# Altium PCB ММС схема D650 T9M.pcbdoc (part 1 of 2)
Units mm, origin at the board's own origin, x right, y up, seen from the top; angles counter-clockwise.
Board outline 130 x 14 mm, 2 copper layers (Top Layer, Bottom Layer), stack 1.57 mm thick; 158 components, 79 nets, 412 pads, 74 vias.
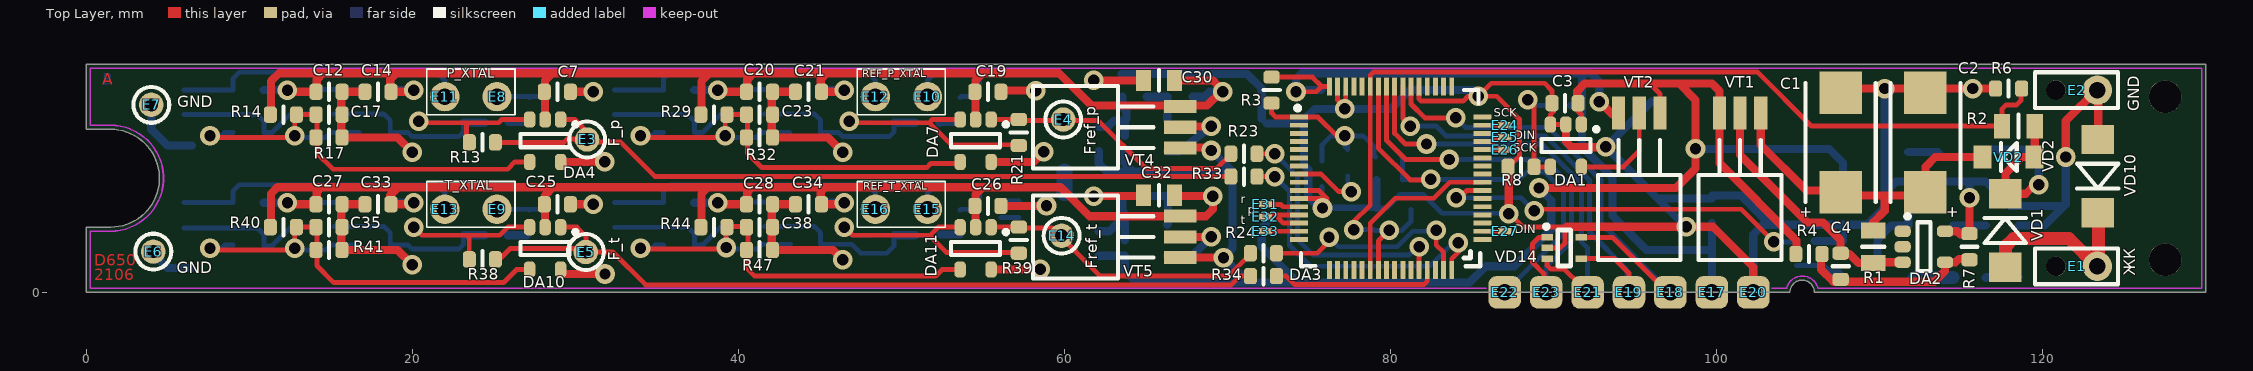
[diagram p0: Top Layer view]
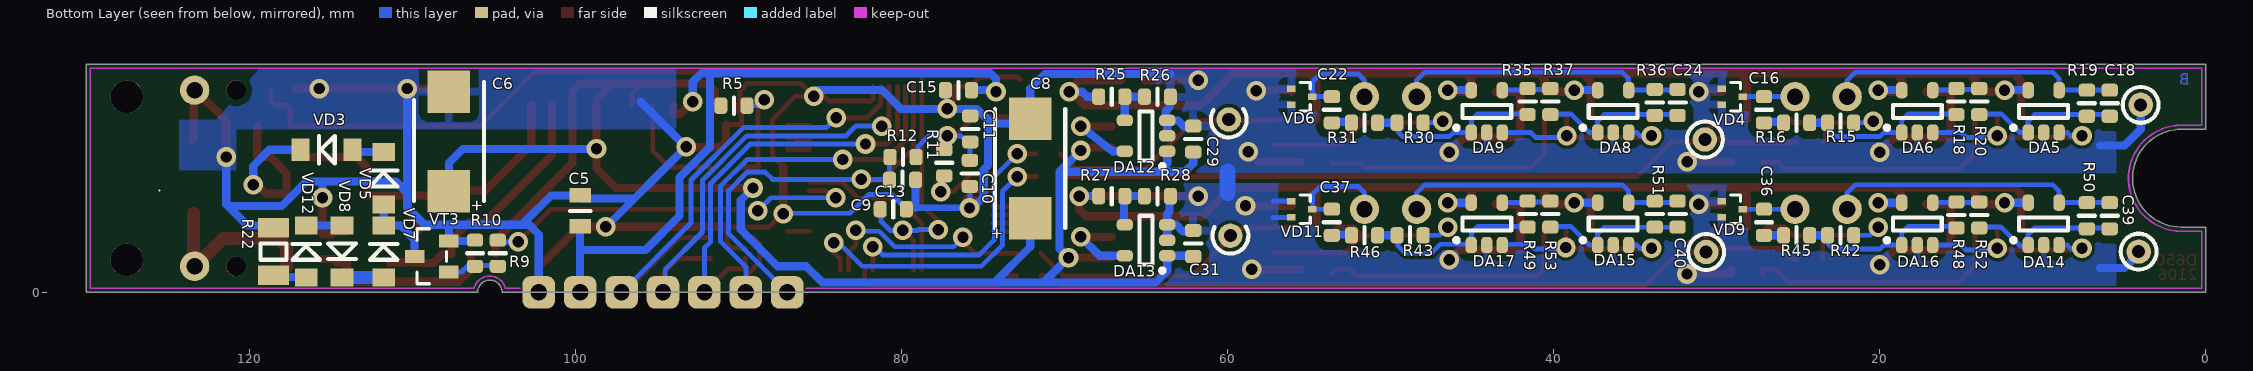
[diagram p1: Bottom Layer view, seen from below]
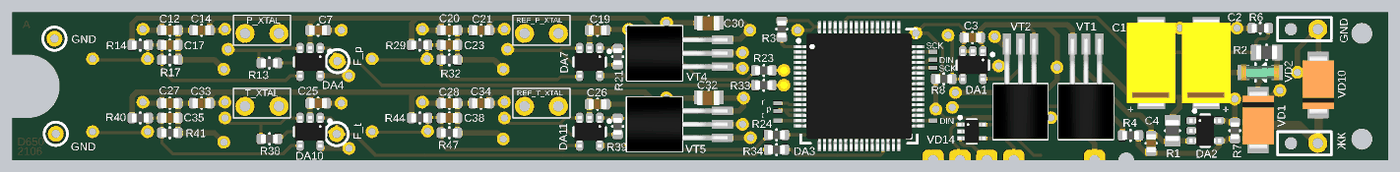
[diagram p2: 3D render of the assembled board from above, using the file's embedded part models]
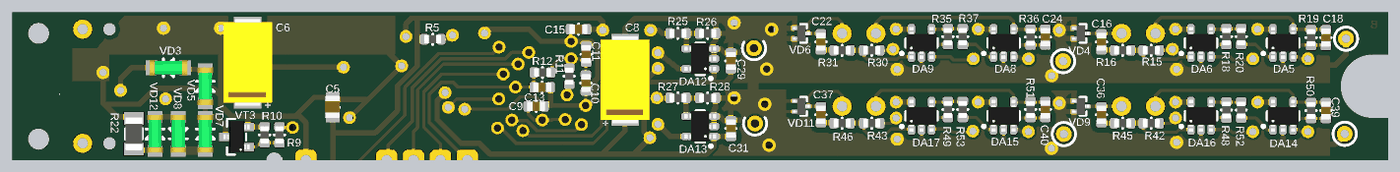
[diagram p3: 3D render of the assembled board from below, using the file's embedded part models]

## Layer stack, top to bottom
Top Solder: solder mask 0.0102, Solder Resist, Dk 3.5
Top Layer: signal copper 0.035
Dielectric1: core 1.5, FR-4, Dk 4.2
Bottom Layer: signal copper 0.035
Bottom Solder: solder mask 0.0102, Solder Resist, Dk 3.5

## Board outline
0,0 0,4 1.5,4 ccw(c1.5,7) 1.5,10 0,10 0,14 130,14 130,0 105.99,0 ccw(c105.24,0) 104.49,0

## Design rules (kind name [scope] priority, off if disabled: settings)
Clearance Clearance_Keepout [OnLayer('Keep-Out Layer')] p1: gap=0.01 ignorepadtopadclearanceinfootprint=FALSE
Clearance Clearance_poly [InNamedPolygon('BOTTOM_GND')] p2: gap=0.35 ignorepadtopadclearanceinfootprint=FALSE except(0.5: SMDPad-Fill SMDPad-Poly SMDPad-Region)
Clearance Clearance_Top_Bot [(OnLayer('Top Layer') OR OnLayer('Bottom Layer'))] p3: gap=0.2 ignorepadtopadclearanceinfootprint=FALSE except(0: Arc-Hole Track-Hole SMDPad-Hole THPad-Hole Via-Hole Fill-Hole Poly-Hole Region-Hole Text-Hole; 0.5: SMDPad-Fill SMDPad-Poly SMDPad-Region)
Clearance Clearance_INTERNAL [(OnLayer('Signal Layer 1') OR OnLayer('Signal Layer 2'))] p4: gap=0.25 ignorepadtopadclearanceinfootprint=FALSE except(0: Arc-Hole Track-Hole SMDPad-Hole THPad-Hole Via-Hole Fill-Hole Poly-Hole Region-Hole Text-Hole)
Clearance "Clearance_Different nets" [All] p5: gap=0.2 ignorepadtopadclearanceinfootprint=FALSE
Clearance "Clearance_Same net" [IsVia vs IsVia] p6: gap=0.3 ignorepadtopadclearanceinfootprint=FALSE except(0: Arc-Hole Track-Hole SMDPad-Hole THPad-Hole Via-Hole Fill-Hole Poly-Hole Region-Hole Text-Hole; 0.5: SMDPad-Fill SMDPad-Poly SMDPad-Region)
Clearance Clearance_PadtoPad [IsPAD vs IsPad] p7: gap=0.2 ignorepadtopadclearanceinfootprint=FALSE except(0: Arc-Hole Track-Hole SMDPad-Hole THPad-Hole Via-Hole Fill-Hole Poly-Hole Region-Hole Text-Hole; 0.5: SMDPad-Fill SMDPad-Poly SMDPad-Region)
ComponentClearance [All] p1: gap=0.2 collisioncheckmode=3 verticalgap=0.2 showdistances=FALSE
DiffPairsRouting DiffPairs_100Ohm [InDifferentialPairClass('All Differential Pairs')] p1: maxlimit=0.3 minlimit=0.3 mostfreqgap=0.3 toplayer_minwidth=0.381 toplayer_maxwidth=0.381 toplayer_prefwidth=0.381 bottomlayer_minwidth=0.381 bottomlayer_maxwidth=0.381 bottomlayer_prefwidth=0.381 maxuncoupledlength=12.7 // 100 Ohm differential traces
HoleSize [All] p1: absolutevalues=TRUE maxlimit=3.5 minlimit=0.025 maxpercent=80.000 minpercent=20.000
MinimumAnnularRing [All] p1: minimumring=0.1
MinimumSolderMaskSliver [All] p1 off: minsoldermaskwidth=0.1
PlaneClearance [All] p1: clearance=0.25
PlaneConnect [All] p1: planeconnectstyle=Direct reliefexpansion=0.508 reliefentries=4 reliefconductorwidth=0.254 reliefairgap=0.254
PolygonConnect [All] p1: thpad.connectstyle=Relief thpad.reliefconductorwidth=0.5 thpad.reliefentries=4 thpad.polygonreliefangle="90 Angle" thpad.airgapwidth=0.5 smdpad.connectstyle=Relief smdpad.reliefconductorwidth=0.5 smdpad.reliefentries=4 smdpad.polygonreliefangle="90 Angle" smdpad.airgapwidth=0.5 via.connectstyle=Direct via.reliefconductorwidth=0.254 via.reliefentries=4 via.polygonreliefangle="90 Angle" via.airgapwidth=0.254
RoutingVias [All] p1: holewidth=0.7 width=1.2 viastyle="Through Hole" minholewidth=0.4 minwidth=0.4 maxholewidth=0.8 maxwidth=1.2
SilkToSilkClearance [All] p1 off: silktosilkclearance=0.1
SilkToSolderMaskClearance [IsPad] p1 off: minsilkscreentomaskgap=0.1 clearancetoexposedcopper=TRUE
SolderMaskExpansion [All] p1: expansion=0.025
Width Width_all [All] p1: maxlimit=1 minlimit=0.3 preferedwidth=0.3 minimp=50.000000 maximp=50.000000 favimp=50.000000 // All other trace width
22 further rules are at their usual default settings.

## Components (designator, comment, footprint, x,y, rotation, side; value= is the part's Value field where it differs from the comment)
C1 "10 мкФ" CP7343-31 107.6,9.2 r90 top
C2 "10 мкФ" CP7343-31 112.8,9.2 r90 top
C3 "1 мкФ" CC0603 90.7,11.6 r180 top
C4 "220 пФ" CC0603 107.6,1.6 r270 top
C5 "4,7 мкФ" CC0805 99.7,5 r90 bottom
C6 "100 мкФ" CP7343-31 107.75,9.25 r90 bottom
C7 "0,1 мкФ" CC0603 28.9,12.3 r0 top
C8 "100 мкФ" CP7343-31 72.1,7.6 r90 bottom
C9 "220 пФ" CC0603 80.5,5.1 r180 bottom
C10 "0,1 мкФ" CC0603 75.8,7.3 r270 bottom
C11 "1 мкФ" CC0603 75.775,10.025 r90 bottom
C12 "0,1 мкФ" CC0603 14.9,12.3 r0 top
C13 "0,1 мкФ" CC0603 79.925,6.9 r180 bottom
C14 "0,1 мкФ" CC0603 17.9,12.3 r180 top
C15 "0,1 мкФ" CC0603 76.5,12.4 r0 bottom
C16 "0,1 мкФ" CC0603 27.1,11.2 r90 bottom
C17 "0,1 мкФ" CC0603 14.9,10.9 r0 top
C18 "22 пФ" CC0603 5.9,11.6 r270 bottom
C19 "0,1 мкФ" CC0603 55.3,12.3 r0 top
C20 "0,1 мкФ" CC0603 41.3,12.3 r0 top
C21 "0,1 мкФ" CC0603 44.3,12.3 r180 top
C22 "0,1 мкФ" CC0603 53.6,11.2 r90 bottom
C23 "0,1 мкФ" CC0603 41.3,10.9 r0 top
C24 "22 пФ" CC0603 32.4,11.646 r270 bottom
C25 "0,1 мкФ" CC0603 28.9,5.4 r0 top
C26 "0,1 мкФ" CC0603 55.3,5.3 r0 top
C27 "0,1 мкФ" CC0603 14.9,5.4 r0 top
C28 "0,1 мкФ" CC0603 41.3,5.4 r0 top
C29 "1 мкФ" CC0603 62.1,9.4 r90 bottom
C30 "4,7 мкФ" CC0805 65.8,13 r180 top
C31 "1 мкФ" CC0603 62.1,3 r90 bottom
C32 "4,7 мкФ" CC0805 65.8,5.95 r180 top
C33 "0,1 мкФ" CC0603 17.9,5.4 r180 top
C34 "0,1 мкФ" CC0603 44.3,5.4 r180 top
C35 "0,1 мкФ" CC0603 14.9,4 r0 top
C36 "0,1 мкФ" CC0603 27.1,4.3 r90 bottom
C37 "0,1 мкФ" CC0603 53.6,4.3 r90 bottom
C38 "0,1 мкФ" CC0603 41.3,4 r0 top
C39 "22 пФ" CC0603 5.9,4.7 r270 bottom
C40 "22 пФ" CC0603 32.4,4.8 r270 bottom
DA1 "TPS76901SDBVTEP" SOT23-5 91.7,10.3 r180 top
DA2 "TLVH431BQDBVRQ1" SOT23-5 111.4,3.75 r270 top
DA3 "MSP430F2619SPM" "LQFP64_SMALL PADS" 80,7 r0 top
DA4 "LMC7211AIM5" SOT23-5 29.1,10.6 r180 top
DA5 "OPA340NA" SOT23-5 10.9,9.8 r180 bottom
DA6 "OPA340NA" SOT23-5 18.65,9.8 r180 bottom
DA7 "LMC7211AIM5" SOT23-5 55.5,10.6 r180 top
DA8 "OPA340NA" SOT23-5 37.3,9.8 r180 bottom
DA9 "OPA340NA" SOT23-5 45.05,9.8 r180 bottom
DA10 "LMC7211AIM5" SOT23-5 29.1,4 r180 top
DA11 "LMC7211AIM5" SOT23-5 55.5,4 r180 top
DA12 "TPS76901SDBVTEP" SOT23-5 63.7,8.65 r90 bottom
DA13 "TPS76901SDBVTEP" SOT23-5 63.7,2.25 r90 bottom
DA14 "OPA340NA" SOT23-5 10.9,2.9 r180 bottom
DA15 "OPA340NA" SOT23-5 37.3,2.9 r180 bottom
DA16 "OPA340NA" SOT23-5 18.65,2.9 r180 bottom
DA17 "OPA340NA" SOT23-5 45.05,2.9 r180 bottom
E1 "ЖК" Holes_x2 123.34,1.6 r90 top
E2 "GND" Holes_x2 123.34,12.4 r90 top
E3 "F_p" KT08X15 30.725,9.375 r0 top
E4 "Fref_p" KT08X15 59.925,10.6 r0 top
E5 "F_t" KT08X15 30.65,2.475 r0 top
E6 "GND" KT08X15 4.125,2.5 r0 top
E7 "GND" KT08X15 4,11.5 r0 top
E8 "P_XTAL1" "HOLES_1 mm"#1 25.2,12 r180 top
E9 "T_XTAL1" "HOLES_1 mm"#1 25.2,5.1 r90 top
E10 "REF_P_XTAL1" "HOLES_1 mm"#1 51.6,12 r90 top
E11 "P_XTAL" "HOLES_1 mm"#2 -1.5,6.2 r90 top
E12 "REF_P_XTAL" "HOLES_1 mm"#1 48.4,12 r90 top
E13 "T_XTAL" "HOLES_1 mm"#1 22,5.1 r90 top
E14 "Fref_t" KT08X15 59.825,3.475 r0 top
E15 "REF_T_XTAL1" "HOLES_1 mm"#1 51.6,5.1 r90 top
E16 "REF_T_XTAL" "HOLES_1 mm"#1 48.4,5.1 r90 top
E17 "KP" "EDGE HOLE"#1 89.799,-5.5 r0 top
E18 "KP" "EDGE HOLE"#2 85.499,-5.5 r0 top
E19 "KP" "EDGE HOLE"#3 114.3,-3.8 r0 top
E20 "KP" "EDGE HOLE"#4 110,-3.8 r0 top
E21 "KP" "EDGE HOLE"#5 105.6,-3.8 r0 top
E22 "KP" "EDGE HOLE"#6 91.56,-4 r0 top
E23 "KP" "EDGE HOLE"#7 97,-3.8 r0 top
E24 "SCK" 0.4x0.8mm#1 87.05,10.25 r180 top
E25 "DIN" 0.4x0.8mm#2 87.15,9.5 r180 top
E26 "SCK" 0.4x0.8mm#1 87.05,8.75 r180 top
E27 "DIN" 0.4x0.8mm#1 87.05,3.75 r180 top
E31 "r" 0.4x0.8mm#1 72.375,5.4 r180 top
E32 "p" 0.4x0.8mm#1 72.375,4.65 r180 top
E33 "t" 0.4x0.8mm#1 72.375,3.75 r180 top
R1 "47 к" RC0805 109.6,2.8 r90 top
R2 "130 к" RC0805 118.5,10.2 r0 top
R3 "12" RC0603 72.7,12.4 r270 top
R4 "301 к" RC0603 105.65,2.35 r180 top
R5 "330 к" RC0603 90.275,11.45 r0 bottom
R6 "10 к" RC0603 117.9,12.5 r0 top
R7 "100 к" RC0603 115.5,2.8 r270 top
R8 "180 к" RC0603 88,7.7 r0 top
R9 "100" RC0603 104.75,2.4 r270 bottom
R10 "47 к" RC0603 106.15,2.4 r270 bottom
R11 "100 к" RC0603 77.375,7.95 r270 bottom
R12 "100 к" RC0603 79.9,8.3 r180 bottom
R13 "10 М" RC0603 24.3,9.2 r0 top
R14 "100 к" RC0603 12.1,10.9 r180 top
R15 "100 к" RC0603 22.4,10.4 r180 bottom
R16 "9,1 к" RC0603 25.1,10.4 r0 bottom
R17 "100 к" RC0603 14.9,9.5 r180 top
R18 "100 к" RC0603 15.3,11.7 r90 bottom
R19 "100 к" RC0603 7.3,11.6 r90 bottom
R20 "3,6 к" RC0603 13.9,11.7 r270 bottom
R21 "10 М" RC0603 57.2,9.8 r90 top
R22 "3,3 к" RES_1206 118.5,2.5 r270 bottom
R23 "4,7 к" RC0603 71,8.5 r0 top
R24 "4,7 к" RC0603 72.2,2.4 r0 top
R25 "330 к" RC0603 67.1,12 r0 bottom
R26 "180 к" RC0603 64.3,12 r0 bottom
R27 "330 к" RC0603 67.1,5.9 r0 bottom
R28 "180 к" RC0603 64.3,5.9 r0 bottom
R29 "100 к" RC0603 38.5,10.9 r180 top
R30 "100 к" RC0603 48.8,10.4 r180 bottom
R31 "9,1 к" RC0603 51.6,10.4 r0 bottom
R32 "100 к" RC0603 41.3,9.5 r180 top
R33 "4,7 к" RC0603 71,7.1 r0 top
R34 "4,7 к" RC0603 72.2,1 r0 top
R35 "100 к" RC0603 41.6,11.7 r90 bottom
R36 "100 к" RC0603 33.8,11.646 r90 bottom
R37 "3,6 к" RC0603 40.2,11.7 r270 bottom
R38 "10 М" RC0603 24.3,2.025 r0 top
R39 "10 М" RC0603 57.2,3.2 r90 top
R40 "100 к" RC0603 12.1,4 r180 top
R41 "100 к" RC0603 14.9,2.6 r180 top
R42 "100 к" RC0603 22.4,3.5 r180 bottom
R43 "100 к" RC0603 48.8,3.5 r180 bottom
R44 "100 к" RC0603 38.5,4 r180 top
R45 "9,1 к" RC0603 25.1,3.5 r0 bottom
R46 "9,1 к" RC0603 51.6,3.5 r0 bottom
R47 "100 к" RC0603 41.3,2.6 r180 top
R48 "100 к" RC0603 15.3,4.75 r90 bottom
R49 "100 к" RC0603 41.6,4.8 r90 bottom
R50 "100 к" RC0603 7.3,4.7 r90 bottom
R51 "100 к" RC0603 33.8,4.8 r90 bottom
R52 "3,6 к" RC0603 13.9,4.75 r270 bottom
R53 "3,6 к" RC0603 40.2,4.8 r270 bottom
VD1 "#NAME?" SMA(DO-214AC) 117.7,3.8 r90 top
VD2 "#NAME?" MiniMELF(SOD-80) 117.9,8.3 r180 top
VD3 "TZMC6V8" MiniMelf(SOD-80) 115.25,8.75 r0 bottom
VD4 "BAV99T" SOT523 28.41,12 r90 bottom
VD5 "TZMC6V8" MiniMelf(SOD-80) 111.75,7 r90 bottom
VD6 "BAV99T" SOT523 54.8,12 r90 bottom
VD7 "TZMC3V3" MiniMelf(SOD-80) 111.75,2.5 r90 bottom
VD8 "TZMC3V3" MiniMelf(SOD-80) 114.3,2.5 r270 bottom
VD9 "BAV99T" SOT523 28.41,5.1 r90 bottom
VD10 "SMAJ33A-TR" SMA(DO-214AC) 123.375,7.125 r270 top
VD11 "BAV99T" SOT523 54.8,5.1 r90 bottom
VD12 "TZMC3V3" MiniMelf(SOD-80) 116.5,2.5 r90 bottom
VD14 "PESD3V3L4UG,115" SC70-5 89.6,3.375 r270 top
VT1 "#NAME?" TO92GOR 101.43,11 r0 top
VT2 "#NAME?" TO92GOR 95.25,11 r0 top
VT3 "ValueSch" SOT23-3 108.8,2.2 r90 bottom
VT4 "#NAME?" TO92GOR 67.1,10.125 r270 top
VT5 "#NAME?" TO92GOR 67.1,3.4 r270 top

## Footprints (in the part's own frame and the unit in brackets; to place one, negate y for a bottom-side part, rotate by r counter-clockwise, add the part's x,y. Pads: shape width x height; smd on the part's side, far side on the other; paste and mask are expansions set on the pad)
0.4x0.8mm#1 [mm]
  rect 0.8x0.4 smd mask+0.07: 1(0.05,0)
0.4x0.8mm#2 [mm]
  rect 0.8x0.4 smd mask+0.07: 1(0.15,0)
CC0603 [mm]
  rrect50% 0.8x1 smd mask+0.07: 1(-0.8,0) 2(0.8,0)
  silkscreen extent 0,-0.5 0,0.5, body extent -0.85,-0.45 0.85,0.45, height 0.5
CC0805 [mm]
  rect 0.9x1.3 smd: 1(-0.95,0) 2(0.95,0)
  Top Layer pour cut-out: -0.5,0.95 0.5,0.95 0.5,-0.95 -0.5,-0.95
  silkscreen extent 0,-0.64 0,0.62, body extent -1,-0.63 1.1,0.72, height 0.7
CP7343-31 [mm]
  rect 2.6x2.6 smd: 1(-3.05,0) 2(3.05,0)
  silkscreen extent -3.65,-2.15 3.65,2.15, body extent -4.1,-2.3 4.1,2.3, height 3.2
"EDGE HOLE"#1 [mm]
  rrect50% 2x2 hole 1 mask+0.07: 1(9.901,5.5)
"EDGE HOLE"#2 [mm]
  rrect50% 2x2 hole 1 mask+0.07: 1(11.661,5.5)
"EDGE HOLE"#3 [mm]
  rrect50% 2x2 hole 1 mask+0.07: 1(-19.68,3.8)
"EDGE HOLE"#4 [mm]
  rrect50% 2x2 hole 1 mask+0.07: 1(-7.76,3.8)
"EDGE HOLE"#5 [mm]
  rrect50% 2x2 hole 1 mask+0.07: 1(-13.52,3.8)
"EDGE HOLE"#6 [mm]
  rrect50% 2x2 hole 1 mask+0.07: 1(-4.56,4)
"EDGE HOLE"#7 [mm]
  rrect50% 2x2 hole 1 mask+0.07: 1(-7.46,3.8)
"HOLES_1 mm"#1 [mm]
  round 1.8 hole 1 mask+0.07: 1(0,0)
"HOLES_1 mm"#2 [mm]
  round 1.8 hole 1 mask+0.07: 1(5.8,-23.5)
Holes_x2 [mm]
  round 1.8 hole 1 mask+0.07: 1(0,0)
  round 1.2 hole 1.2 unplated: 2(0,2.54)
  silkscreen extent -1.1,-1.27 1.1,3.81
KT08X15 [mm]
  round 1.5 hole 0.8 mask+0.07: 1(0,0)
  silkscreen extent -1.1,-1.1 1.1,1.1
"LQFP64_SMALL PADS" [mm]
  rect 1.1x0.3 smd: 1(-5.625,3.75) 2(-5.625,3.25) 3(-5.625,2.75) 4(-5.625,2.25) 5(-5.625,1.75) 6(-5.625,1.25) 7(-5.625,0.75) 8(-5.625,0.25) 9(-5.625,-0.25) 10(-5.625,-0.75) 11(-5.625,-1.25) 12(-5.625,-1.75) 13(-5.625,-2.25) 14(-5.625,-2.75) 15(-5.625,-3.25) 16(-5.625,-3.75) 33(5.625,-3.75) 34(5.625,-3.25) 35(5.625,-2.75) 36(5.625,-2.25) 37(5.625,-1.75) 38(5.625,-1.25) 39(5.625,-0.75) 40(5.625,-0.25) 41(5.625,0.25) 42(5.625,0.75) 43(5.625,1.25) 44(5.625,1.75) 45(5.625,2.25) 46(5.625,2.75) 47(5.625,3.25) 48(5.625,3.75)
  rect 0.3x1.1 smd: 17(-3.75,-5.625) 18(-3.25,-5.625) 19(-2.75,-5.625) 20(-2.25,-5.625) 21(-1.75,-5.625) 22(-1.25,-5.625) 23(-0.75,-5.625) 24(-0.25,-5.625) 25(0.25,-5.625) 26(0.75,-5.625) 27(1.25,-5.625) 28(1.75,-5.625) 29(2.25,-5.625) 30(2.75,-5.625) 31(3.25,-5.625) 32(3.75,-5.625) 49(3.75,5.625) 50(3.25,5.625) 51(2.75,5.625) 52(2.25,5.625) 53(1.75,5.625) 54(1.25,5.625) 55(0.75,5.625) 56(0.25,5.625) 57(-0.25,5.625) 58(-0.75,5.625) 59(-1.25,5.625) 60(-1.75,5.625) 61(-2.25,5.625) 62(-2.75,5.625) 63(-3.25,5.625) 64(-3.75,5.625)
  silkscreen extent -5.82,-4.9 4.9,4.42, body extent -6,-6 6,6, height 1.47
MiniMELF(SOD-80) [mm]
  rect 1.1x1.4 smd: 1(-1.6,0) 2(1.6,0)
  silkscreen extent -0.5,-0.85 0.46,0.85, body extent -1.8,-0.75 1.8,0.75, height 1.5
MiniMelf(SOD-80) [mm]
  rect 1.1x1.4 smd: 1(-1.6,0) 2(1.6,0)
  silkscreen extent -0.5,-0.85 0.46,0.85, body extent -1.8,-0.75 1.8,0.75, height 1.5
RC0603 [mm]
  rrect50% 0.8x1 smd mask+0.07: 1(-0.8,0) 2(0.8,0)
  silkscreen extent 0,-0.5 0,0.5, body extent -0.8,-0.4 0.8,0.4, height 0.45
RC0805 [mm]
  rect 1x1.5 smd: 1(-1,0) 2(1,0)
  Top Layer pour cut-out: -0.5,1.05 0.5,1.05 0.5,-1.05 -0.5,-1.05
  silkscreen extent 0,-0.7 0,0.7, body extent -1,-0.62 1,0.63, height 0.5
RES_1206 [mm]
  rect 1.2x1.9 smd mask+0.07: 1(-1.45,0) 2(1.45,0)
  silkscreen extent -0.5,-0.8 0.5,0.8, body extent -1.55,-0.8 1.55,0.8, height 0.6
SC70-5 [mm]
  rect 0.4x0.7 smd mask+0.07: 1(0,0) 2(0.65,0) 3(1.3,0) 4(1.3,2.1) 5(0,2.1)
  silkscreen extent -0.77,-0.16 1.75,1.45, body extent -0.45,-0.25 1.75,2.35, height 1.11
SMA(DO-214AC) [mm]
  rect 1.8x2 smd: 1(-2.25,0) 2(2.25,0)
  silkscreen extent -0.76,-1.27 0.76,1.27, body extent -2.8,-1.5 2.8,1.5, height 2.2
SOT23-3 [mm]
  rect 0.8x1.2 smd mask+0.07: 1(-0.95,-1.05) 2(0.95,-1.05) 3(0,1.05)
  Top Layer pour cut-out: -1.35,-1.65 -1.35,1.65 1.35,1.65 1.35,-1.65
  silkscreen extent -1.67,-0.9 1.7,0.9, body extent -1.5,-1.25 1.5,1.25, height 1.1
SOT23-5 [mm]
  rrect70% 0.7x1 smd mask+0.07: 1(0,0) 2(0.95,0) 3(1.9,0) 4(1.9,2.6) 5(0,2.6)
  silkscreen extent -1.02,0.19 2.45,1.7, body extent -0.5,-0.2 2.4,2.8, height 1.46
SOT523 [mm]
  rect 0.4x0.51 smd mask+0.07: 1(0.5,1.29) 2(-0.5,1.29) 3(0,0)
  silkscreen extent -0.87,0.12 0.87,0.75, body extent -0.8,-0.15 0.8,1.45, height 0.8
TO92GOR [mm]
  rect 0.8x2 smd: 1(-1.27,0) 2(0,0) 3(1.27,0)
  silkscreen extent -2.54,-9.02 2.54,-1.65, body extent -2.58,-9.01 2.58,0.5, height 4.18

## Part data
C1 C2: library part IDCTant0001, "Танталовый чип конденсатор D Case; 10 мкФ; 10%; 50 В; -55..+150", Manufacturer=KEMET, Package, in="D Case", PartNumber=T498D106K050ATE1K0, Temperature=-55..+150, Tolerance=10%, ValueBOM="Конденсатор T498D106K050ATE1K0 KEMET", Voltage, V=50, BOM="Танталовый чип конденсатор D Case; 10 мкФ; 10%; 50 В; -55..+150", ID=IDCTant0001
C3 C11 C29 C31: library part IDC06030017, "Керамический чип конденсатор 0603; 1 мкФ; 10%; 16 В; X8L; -55..+150", Manufacturer=TDK, Package, in=0603, PartNumber=C1608X8L1C105K080AC, TCC (Dielectric type)=X8L, Temperature=-55..+150, Tolerance=10%, ValueBOM="Конденсатор C1608X8L1C105K080AC TDK", Voltage, V=16, BOM="Керамический чип конденсатор 0603; 1 мкФ; 10%; 16 В; X8L; -55..+150", ID=IDC06030017
C4 C9: library part IDC06030018, "Керамический чип конденсатор 0603; 220 пФ; 5%; 50 В; NP0; -55..+150", Manufacturer=TDK, Package, in=0603, PartNumber=CGA3E2NP01H221J080AA, TCC (Dielectric type)=NP0, Temperature=-55..+150, Tolerance=5%, ValueBOM="Конденсатор CGA3E2NP01H221J080AA TDK", Voltage, V=50, BOM="Керамический чип конденсатор 0603; 220 пФ; 5%; 50 В; NP0; -55..+150", ID=IDC06030018
C5 C30 C32: library part IDC08050013, "Керамический чип конденсатор 0805; 4,7 мкФ; 10%; 16 В; X8L; -55..+150", Manufacturer=TDK, Package, in=0805, PartNumber=C2012X8L1C475K125AC, TCC (Dielectric type)=X8L, Tolerance=10%, ValueBOM="Конденсатор C2012X8L1C475K125AC TDK", Voltage, V=16, BOM="Керамический чип конденсатор 0805; 4,7 мкФ; 10%; 16 В; X8L; -55..+150", F10=-55..+150, ID=IDC08050013
C6 C8: library part IDCTant0002, "Танталовый чип конденсатор D Case; 100 мкФ; 10%; 10 В; -55..+150", Manufacturer=KEMET, Package, in="D Case", PartNumber=T498D107K010ATE600, Temperature=-55..+150, Tolerance=10%, ValueBOM="Конденсатор T498D107K010ATE600 KEMET", Voltage, V=10, BOM="Танталовый чип конденсатор D Case; 100 мкФ; 10%; 10 В; -55..+150", ID=IDCTant0002
C7 C10 C12 C13 C14 C15 C16 C17 C19 C20 C21 C22 C23 C25 C26 C27 C28 C33 C34 C35 C36 C37 C38: library part IDC06030020, "Керамический чип конденсатор 0603; 0,1 мкФ; 10%; 25 В; X8R; -55..+150", Manufacturer=TDK, Package, in=0603, PartNumber=CGA3E2X8R1E104K080AE, TCC (Dielectric type)=X8R, Temperature=-55..+150, Tolerance=10%, ValueBOM="Конденсатор CGA3E2X8R1E104K080AE TDK", Voltage, V=25, BOM="Керамический чип конденсатор 0603; 0,1 мкФ; 10%; 25 В; X8R; -55..+150", ID=IDC06030020
C18 C24 C39 C40: library part IDC06030023, "Керамический чип конденсатор 0603; 22 пФ; 5%; 50 В; C0G; -55..+125", Manufacturer=TDK, Package, in=0603, PartNumber=CGA3E2C0G1H220J080AA, TCC (Dielectric type)=C0G, Temperature=-55..+125, Tolerance=5%, ValueBOM="Конденсатор CGA3E2C0G1H220J080AA TDK", Voltage, V=50, BOM="Керамический чип конденсатор 0603; 22 пФ; 5%; 50 В; C0G; -55..+125", ID=IDC06030023
DA1 DA12 DA13: library part LDO0006, "Линейный понижающий стабилизатор регулируемый 1.2..4.5В ; Uвх 5..10В; Iвых 100 mA; -50..+150; SOT23-5", Manufacturer="Texas Instruments", Package=SOT23-5, Temperature=-55..+150, ValueBOM="Микросхема TPS76901SDBVTEP Texas Instruments", BOM="Линейный понижающий стабилизатор регулируемый 1.2..4.5В ; Uвх 5..10В; Iвых 100 mA; -50..+150; SOT23-5", ID=LDO0006, PartNumber=TPS76901SDBVTEP, ValueSch=TPS76901SDBVTEP
DA2: library part LDO0007, "Линейный понижающий стабилизатор регулируемый 1.24..18В ; -50..+125; SOT23-5", Manufacturer="Texas Instruments", Package=SOT23-5, Temperature=-55..+125, ValueBOM="Микросхема TLVH431BQDBVRQ1 Texas Instruments", BOM="Линейный понижающий стабилизатор регулируемый 1.24..18В ; -50..+125; SOT23-5", ID=LDO0007, PartNumber=TLVH431BQDBVRQ1, ValueSch=TLVH431BQDBVRQ1
DA3: library part MCU0003, "Микроконтроллер 16 бит; 120 кБ flash; 4 кБ RAM; 12-Bit ADC; Dual DAC; 2 USCI; DMA; LQFP-64; -55..+150", Manufacturer="Texas Instruments", Package=LQFP-64, ValueBOM="Микросхема MSP430F2619SPM Texas Instruments", BOM="Микроконтроллер 16 бит; 120 кБ flash; 4 кБ RAM; 12-Bit ADC; Dual DAC; 2 USCI; DMA; LQFP-64; -55..+150", ID=MCU0003, PartNumber=MSP430F2619SPM, ValueSch=MSP430F2619SPM
DA4 DA7 DA10 DA11: library part IDOPAMP0006, "Операционный усилитель; Rail to rail; Uпит=2,7..15В; -40..+85С; SOT-23-5", Manufacturer="Texas Instruments", Package=SOT-23-5, ValueBOM="Микросхема LMC7211AIM5 Texas Instruments", BOM="Операционный усилитель; Rail to rail; Uпит=2,7..15В; -40..+85С; SOT-23-5", ID=IDOPAMP0006, PartNumber=LMC7211AIM5, ValueSch=LMC7211AIM5
DA5 DA6 DA8 DA9 DA14 DA15 DA16 DA17: library part IDOPAMP0005, "Операционный усилитель; Rail to rail; Uпит=2,7..5,5В; -40..+125С; SOT-23-5", Manufacturer="Texas Instruments", Package=SOT-23-5, ValueBOM="Микросхема OPA340NA Texas Instruments", BOM="Операционный усилитель; Rail to rail; Uпит=2,7..5,5В; -40..+125С; SOT-23-5", ID=IDOPAMP0005, PartNumber=OPA340NA, ValueSch=OPA340NA
E1 E2 E24 E25 E26 E27 E31 E32 E33: library part KP
E3 E4 E5 E6 E7 E14: library part KP_3, "КП"
E8 E9 E10 E11 E12 E13 E15 E16: library part 1KPBIG, ValueBOM="Контактная площадка", ValueSch="Розетка 1KPBIG", Part Number=1KPBIG, Type=X, КЛАСС=Розетка, ТИП=1KPBIG
R1: library part IDR08050004, "Чип резистор 0805; 47 кОм; 1%; 100 В; 0,125", Manufacturer=Yageo, Package, in=0805, PartNumber=RC0805FR-0747KL, Power, W=0,125, Tolerance=1%, ValueBOM="Чип резистор RC0805FR-0747KL Yageo", Voltage, V=100, BOM="Чип резистор 0805; 47 кОм; 1%; 100 В; 0,125", HelpURL=https://www.yageo.com/upload/media/product/products/datasheet/rchip/PYu-RC_Group_51_RoHS_L_11.pdf, ID=IDR08050004, TCR (ppm/°C)=100
R2: library part IDR08050005, "Чип резистор 0805; 130 кОм; 1%; 100 В; 0,125", Manufacturer=Yageo, Package, in=0805, PartNumber=RC0805FR-07130KL, Power, W=0,125, Tolerance=1%, ValueBOM="Чип резистор RC0805FR-07130KL Yageo", Voltage, V=100, BOM="Чип резистор 0805; 130 кОм; 1%; 100 В; 0,125", HelpURL=https://www.yageo.com/upload/media/product/products/datasheet/rchip/PYu-RC_Group_51_RoHS_L_11.pdf, ID=IDR08050005, TCR (ppm/°C)=100
R3: library part IDR06030009, "Чип резистор 0603; 12Ом; 1%; 50 В; 0,1", Manufacturer=Yageo, Package, in=0603, PartNumber=RC0603FR-0712RL, Power, W=0,1, Tolerance=1%, ValueBOM="Чип резистор RC0603FR-0712RL Yageo", Voltage, V=50, BOM="Чип резистор 0603; 12Ом; 1%; 50 В; 0,1", ID=IDR06030009, TCR (ppm/°C)=100
R4: library part IDR06030010, "Чип резистор 0603; 301 кОм; 1%; 50 В; 0,1", Manufacturer=Yageo, Package, in=0603, PartNumber=RC0603FR-07301KL, Power, W=0,1, Tolerance=1%, ValueBOM="Чип резистор RC0603FR-07301KL Yageo", Voltage, V=50, BOM="Чип резистор 0603; 301 кОм; 1%; 50 В; 0,1", ID=IDR06030010, TCR (ppm/°C)=100
R5 R25 R27: library part IDR06030011, "Чип резистор 0603; 330 кОм; 1%; 50 В; 0,1", Manufacturer=Yageo, Package, in=0603, PartNumber=RC0603FR-07330KL, Power, W=0,1, Tolerance=1%, ValueBOM="Чип резистор RC0603FR-07330KL Yageo", Voltage, V=50, BOM="Чип резистор 0603; 330 кОм; 1%; 50 В; 0,1", ID=IDR06030011, TCR (ppm/°C)=100
R6: library part IDR06030012, "Чип резистор 0603; 10 кОм; 1%; 50 В; 0,1", Manufacturer=Yageo, Package, in=0603, PartNumber=RC0603FR-0710KL, Power, W=0,1, Tolerance=1%, ValueBOM="Чип резистор RC0603FR-0710KL Yageo", Voltage, V=50, BOM="Чип резистор 0603; 10 кОм; 1%; 50 В; 0,1", ID=IDR06030012, TCR (ppm/°C)=100
R7 R11 R12 R14 R15 R17 R18 R19 R29 R30 R32 R35 R36 R40 R41 R42 R43 R44 R47 R48 R49 R50 R51: library part IDR06030013, "Чип резистор 0603; 100 кОм; 1%; 50 В; 0,1", Manufacturer=Yageo, Package, in=0603, PartNumber=RC0603FR-07100KL, Power, W=0,1, Tolerance=1%, ValueBOM="Чип резистор RC0603FR-07100KL Yageo", Voltage, V=50, BOM="Чип резистор 0603; 100 кОм; 1%; 50 В; 0,1", ID=IDR06030013, TCR (ppm/°C)=100
R8 R26 R28: library part IDR06030014, "Чип резистор 0603; 180 кОм; 1%; 50 В; 0,1", Manufacturer=Yageo, Package, in=0603, PartNumber=RC0603FR-07180KL, Power, W=0,1, Tolerance=1%, ValueBOM="Чип резистор RC0603FR-07180KL Yageo", Voltage, V=50, BOM="Чип резистор 0603; 180 кОм; 1%; 50 В; 0,1", ID=IDR06030014, TCR (ppm/°C)=100
R9: library part IDR06030015, "Чип резистор 0603; 100Ом; 1%; 50 В; 0,1", Manufacturer=Yageo, Package, in=0603, PartNumber=RC0603FR-07100RL, Power, W=0,1, Tolerance=1%, ValueBOM="Чип резистор RC0603FR-07100RL Yageo", Voltage, V=50, BOM="Чип резистор 0603; 100Ом; 1%; 50 В; 0,1", ID=IDR06030015, TCR (ppm/°C)=100
R10: library part IDR06030016, "Чип резистор 0603; 47 кОм; 1%; 50 В; 0,1", Manufacturer=Yageo, Package, in=0603, PartNumber=RC0603FR-0747KL, Power, W=0,1, Tolerance=1%, ValueBOM="Чип резистор RC0603FR-0747KL Yageo", Voltage, V=50, BOM="Чип резистор 0603; 47 кОм; 1%; 50 В; 0,1", ID=IDR06030016, TCR (ppm/°C)=100
R13 R21 R38 R39: library part IDR06030004, "Чип резистор 0603; 10 МОм; 1%; 50 В; 0,1", Manufacturer=Yageo, Package, in=0603, PartNumber=RC0603FR-0710ML, Power, W=0,1, Tolerance=1%, ValueBOM="Чип резистор RC0603FR-0710ML Yageo", Voltage, V=50, BOM="Чип резистор 0603; 10 МОм; 1%; 50 В; 0,1", ID=IDR06030004, TCR (ppm/°C)=100
R16 R31 R45 R46: library part IDR06030020, "Чип резистор 0603; 9,1 кОм; 1%; 50 В; 0,1", Manufacturer=Yageo, Package, in=0603, PartNumber=RC0603FR-079K1L, Power, W=0,1, Tolerance=1%, ValueBOM="Чип резистор RC0603FR-079K1L Yageo", Voltage, V=50, BOM="Чип резистор 0603; 9,1 кОм; 1%; 50 В; 0,1", ID=IDR06030020, TCR (ppm/°C)=100
R20 R37 R52 R53: library part IDR06030021, "Чип резистор 0603; 3,6 кОм; 1%; 50 В; 0,1", Manufacturer=Yageo, Package, in=0603, PartNumber=RC0603FR-073K6L, Power, W=0,1, Tolerance=1%, ValueBOM="Чип резистор RC0603FR-073K6L Yageo", Voltage, V=50, BOM="Чип резистор 0603; 3,6 кОм; 1%; 50 В; 0,1", ID=IDR06030021, TCR (ppm/°C)=100
R22: library part IDR12060001, "Чип резистор 1206; 3,3 кОм; 5%; 200 В; 0,25", Manufacturer=Yageo, Package, in=1206, PartNumber=RC1206JR-073K3L, Power, W=0,25, Tolerance=5%, ValueBOM="Чип резистор RC1206JR-073K3L Yageo", Voltage, V=200, BOM="Чип резистор 1206; 3,3 кОм; 5%; 200 В; 0,25", ID=IDR12060001, TCR (ppm/°C)=100
R23 R24 R33 R34: library part IDR06030018, "Чип резистор 0603; 4,7 кОм; 1%; 50 В; 0,1", Manufacturer=Yageo, Package, in=0603, PartNumber=RC0603FR-074K7L, Power, W=0,1, Tolerance=1%, ValueBOM="Чип резистор RC0603FR-074K7L Yageo", Voltage, V=50, BOM="Чип резистор 0603; 4,7 кОм; 1%; 50 В; 0,1", ID=IDR06030018, TCR (ppm/°C)=100
VD1: library part VD000001, "Диод If=1 А; Ur = 700В; SMA; -65C..+150C", Current=1, Manufacturer="Diodes Incorporated", Package, in=SMA, PartNumber=US1M-13-F, Reverce Voltage, V=700, Temperature=-65C..+150C, ValueBOM="Диод US1M-13-F Diodes Incorporated", BOM="Диод If=1 А; Ur = 700В; SMA; -65C..+150C", ID=VD000001
VD2: library part VD000002, "Диод If=0,5 А; Ur = 75В; MiniMELF; -65C..+175C", Current=0,5, Manufacturer=VISHAY, Package, in=MiniMELF, PartNumber=LL4148, Reverce Voltage, V=75, Temperature=-65C..+175C, ValueBOM="Диод LL4148 VISHAY", BOM="Диод If=0,5 А; Ur = 75В; MiniMELF; -65C..+175C", ID=VD000002
VD3 VD5: library part VDZn0001, "Стабилитрон Iст=5 мА; Uст = 6,8В; MiniMELF; -65C..+175C", Current=5, Manufacturer=VISHAY, Package, in=MiniMELF, Temperature=-65C..+175C, ValueBOM="Стабилитрон TZMC6V8 VISHAY", Voltage, V=6,8, BOM="Стабилитрон Iст=5 мА; Uст = 6,8В; MiniMELF; -65C..+175C", ID=VDZn0001, PartNumber=TZMC6V8
VD4 VD6 VD9 VD11: "Диод BAV99T", ValueBOM="Диод BAV99T Diodes", Part Number=BAV99T, Type=VD, ValueSch=BAV99T, ГОСТ=Diodes, КЛАСС=Диод
VD7 VD8 VD12: library part VDZn0002, "Стабилитрон Iст=5 мА; Uст = 3,3В; MiniMELF; -65C..+175C", Current=5, Manufacturer=VISHAY, Package, in=MiniMELF, Temperature=-65C..+175C, ValueBOM="Стабилитрон TZMC3V3 VISHAY", Voltage, V=3,3, BOM="Стабилитрон Iст=5 мА; Uст = 3,3В; MiniMELF; -65C..+175C", ID=VDZn0002, PartNumber=TZMC3V3
VD10: library part VDTVS0004, "Однонаправленый TVS диод If= А; Ur = 33В; SMA(DO-214AC); -55C..+150C", Manufacturer="ST Microelectronics", Package, in=SMA(DO-214AC), Reverce Voltage, V=33, Temperature=-55C..+150C, ValueBOM="TVS диод SMAJ33A-TR ST Microelectronics", BOM="Однонаправленый TVS диод If= А; Ur = 33В; SMA(DO-214AC); -55C..+150C", ID=VDTVS0004, PartNumber=SMAJ33A-TR
VD14: library part VDTVS0005, "Однонаправленый TVS диод If= А; Ur = 3,3В; SOT353; -65C..+150C", Manufacturer=Nexperia, Package, in=SOT353, Reverce Voltage, V=3,3, Temperature=-65C..+150C, ValueBOM="TVS диод PESD3V3L4UG,115 Nexperia", BOM="Однонаправленый TVS диод If= А; Ur = 3,3В; SOT353; -65C..+150C", ID=VDTVS0005, PartNumber=PESD3V3L4UG,115
VT1 VT2 VT4 VT5: library part IDBIPOLAR0001, "Транзистор биполярный NPN; U=400 В;  I=0,5 А; TO92; -55С..+200С", Current, A=0,5, Manufacturer="Diodes Inc", Package=TO92, PartNumber=ZTX658, Temperature=-55С..+200С, ValueBOM="Транзистор ZTX658 Diodes Inc", Voltage, V=400, BOM="Транзистор биполярный NPN; U=400 В;  I=0,5 А; TO92; -55С..+200С", Channel=NPN, ID=IDBIPOLAR0001
VT3: library part IDMOSFET0002, "Транзистор MOSFET N-channel; U=60 В; R=0,245 Ом; I=4 А; SOT-23; -55С..+175С", Current, A=4, Manufacturer=Vishay, Package=SOT-23, PartNumber=SQ2364EES, Temperature=-55С..+175С, ValueBOM="Транзистор SQ2364EES Vishay", Voltage, V=60, BOM="Транзистор MOSFET N-channel; U=60 В; R=0,245 Ом; I=4 А; SOT-23; -55С..+175С", Channel=N, ID=IDMOSFET0002, Rds, Ohm=0,245

## Free pads (board coordinates)
  round 2 hole 2 unplated: 1(127.5,2) 1(127.5,12)

## Via types
v1: diameter 1.2, hole 0.7, Top Layer to Bottom Layer, 74 vias

## Nets (pads, with @x,y where several pads share a name; then routed paths per layer and width w, separated by ;. In a path a pad name is that pad's centre, name@x,y a point inside that pad or via, vN(x,y) a via of type N, cw(c..) or ccw(c..) an arc to the next point about the centre after c; other vN are vias at no path point)
3V3_A: C5.1 C15.1 DA3.64 E17.1 R3.1 R5.2 VT2.1 | length 51.6
  Top Layer w0.3: R3.1@72.7,13.05 72.85,13.2 75.2,13.2 75.775,12.625 ; v1(74.2,12.3) 75.45,12.3 75.775,12.625 ; DA3.64 75.775,12.625
  Top Layer w0.5: v1(92.8,11.7) 93.6,10.9 93.88,10.9 VT2.1 VT2.1@93.98,11.5
  Bottom Layer w0.5: C15.1@75.75,12.4 C15.1 74.3,12.4 v1(74.2,12.3) 74.2,13.1 74.54,13.44 91.735,13.44 ; R5.2 91.685,11.45 91.735,11.4 ; v1(92.8,11.7) 92.8,12.9 92.26,13.44 91.735,13.44 ; E17.1 99.7,2.6 ; C5.1@99.7,4.25 C5.1 99.7,2.6 ; 91.735,11.4 91.735,13.44 ; 91.735,11.4 91.735,8.905 93.6,7.04 93.6,4.7 95.7,2.6 99.7,2.6
3V3_D: C10.1 C11.1 DA3.1 R3.2 R11.1 R12.2 | length 12.6
  Top Layer w0.3: R3.2@72.7,11.65 R3.2 72.7,11 72.95,10.75 DA3.1 75.55,10.75 76.7,9.6 v1(77.2,9.6) v1@77.2,9.8
  Bottom Layer w0.3: C10.1@75.8,8.05 C10.1 75.8,9.05 76.35,9.6 v1(77.2,9.6) ; v1@77.725,9.6 78.325,9.6 79,8.925 79,8.375 R12.2@79.075,8.3 ; v1(77.2,9.6) 77.375,9.425 R11.1 77.2,8.925 v1(77.2,9.6)
3V3_PRESS: C7.1 C12.1 C14.1 C19.1 C20.1 C21.1 C30.1 DA4.2 DA5.5 DA6.5 DA7.2 DA8.5 DA9.5 R14.2 R25.2 R29.2 VT4.1 | length 93.3
  Top Layer w0.5: R14.2@11.35,10.9 11.35,12.95 11.84,13.44 14.54,13.44 ; v1@12.35,12.3 C12.1 14.15,12.3 14.15,13.05 14.54,13.44 ; 19.04,13.44 18.65,13.05 18.65,12.3 v1@20.1,12.3 ; DA4.2 28.15,12.99 28.6,13.44 ; R29.2@37.75,10.9 37.75,12.95 38.24,13.44 ; v1@38.75,12.3 C20.1 40.55,12.3 40.55,13.05 40.94,13.44 ; 45.44,13.44 45.05,13.05 45.05,12.3 v1@46.5,12.3 ; DA7.2 54.55,12.99 55,13.44 ; C30.1@66.55,13 C30.1 69.1,13 69.4,12.7 v1@69.4,12.4 ; v1(69.7,12.3) 69.6,12.3 68.75,11.45 61.65,11.45 59.66,13.44 55,13.44 ; 14.54,13.44 38.24,13.44 ; 38.24,13.44 40.94,13.44 ; 40.94,13.44 55,13.44
  Bottom Layer w0.5: DA5.5 v1(12.35,12.4) ; DA6.5 v1(20.1,12.4) ; DA8.5 v1(38.75,12.4) ; DA9.5 v1(46.5,12.4) ; R25.2@67.85,12 R25.2 68.6,12 68.9,12.3 v1(69.7,12.3)
3V3_TEMP: C25.1 C26.1 C27.1 C28.1 C32.1 C33.1 C34.1 DA10.2 DA11.2 DA14.5 DA15.5 DA16.5 DA17.5 R27.2 R40.2 R44.2 VT5.1 | length 90.5
  Top Layer w0.5: R40.2@11.35,4 11.35,6.05 11.75,6.45 14.45,6.45 ; v1@12.35,5.4 C27.1 14.15,5.4 14.15,6.15 14.45,6.45 ; v1@20.1,5.4 18.65,5.4 18.65,5.95 19.15,6.45 ; DA10.2 28.15,5.95 28.65,6.45 ; R44.2@37.75,4 37.75,6.05 38.15,6.45 ; v1@38.75,5.4 40.55,5.4 40.55,6.15 40.85,6.45 ; v1@46.5,5.4 45.05,5.4 45.05,6.15 45.35,6.45 ; DA11.2 54.55,6 55,6.45 ; C32.1@66.55,5.9 v1(69.1,5.9) 69.1,5.1 68.67,4.67 VT5.1 61.53,4.67 59.75,6.45 55,6.45 ; 14.45,6.45 19.15,6.45 ; 19.15,6.45 28.65,6.45 ; 28.65,6.45 38.15,6.45 ; 38.15,6.45 40.85,6.45 ; 40.85,6.45 45.35,6.45 ; 45.35,6.45 55,6.45
  Bottom Layer w0.5: DA14.5 v1(12.35,5.5) ; DA16.5 v1(20.1,5.5) ; DA15.5 v1(38.75,5.5) ; DA17.5 v1(46.5,5.5) ; R27.2@67.85,5.9 R27.2 v1(69.1,5.9)
30V: C1.1 C2.1 R1.2 VD2.2 VT1.3 | length 21.9
  Top Layer w0.5: VT1.3@102.7,11.5 102.7,9.05 105.5,6.25 107.4,6.25 C1.1@107.9,5.75 ; C1.1@107.9,5.95 110.3,5.95 ; R1.2 109.6,4.3 110.3,5 110.3,5.95 ; VD2.2 113.4,8.3 112.8,7.7 C2.1 112.8,5.95 110.3,5.95
+1V65_P: C17.1 DA4.4 DA5.3 DA6.3 R14.1 R17.2 | length 29
  Top Layer w0.3: v1@7.6,9.5 12.8,9.5 12.8,10.85 R14.1@12.85,10.9 ; R14.1@12.95,10.9 14.15,10.9 14.15,8.55 15.15,7.55 25.85,7.55 26.3,8 DA4.4
  Bottom Layer w0.3: v1(7.6,9.6) 8.3,9.6 8.5,9.8 DA5.3 ; v1@13.2,9.5 14.7,9.5 15,9.8 DA6.3
  other v1: 12.8,9.6
+1V65_PREF: C23.1 DA7.4 DA8.3 DA9.3 R29.1 R32.2 | length 29.4
  Top Layer w0.3: v1@34,9.5 39.2,9.5 v1(39.2,9.6) 39.2,10.85 R29.1@39.25,10.9 ; R29.1@39.35,10.9 C23.1 40.55,10.9 40.55,8.55 41.45,7.65 51.55,7.65 51.8,7.9 53.6,7.9 DA7.4
  Bottom Layer w0.3: v1(34,9.6) 34.7,9.6 34.9,9.8 DA8.3 ; v1@39.3,9.8 39.6,9.5 41.1,9.5 41.4,9.8 DA9.3
+1V65_T: C35.1 DA10.4 DA14.3 DA16.3 R40.1 R41.2 | length 29.4
  Top Layer w0.3: v1@7.6,2.6 12.8,2.6 12.8,3.95 R40.1@12.85,4 ; R40.1@12.95,4 C35.1 14.15,4 14.15,1.65 15.2,0.6 25.6,0.6 26.4,1.4 DA10.4 DA10.4@27.2,1.1
  Bottom Layer w0.3: v1(7.6,2.7) 8.3,2.7 8.5,2.9 DA14.3 ; v1@13.2,2.6 14.7,2.6 15,2.9 DA16.3
  other v1: 12.8,2.7
+1V65_TREF: C38.1 DA11.4 DA15.3 DA17.3 R44.1 R47.2 | length 29.5
  Top Layer w0.3: v1@34.05,2.65 39.25,2.65 v1(39.25,2.75) 39.25,4 R44.1@39.3,4.05 ; R44.1@39.4,4.05 40.6,4.05 40.6,1.4 41,1 52.1,1 52.5,1.4 53.4,1.4 DA11.4@53.65,1.15
  Bottom Layer w0.3: v1(34,2.7) 34.7,2.7 34.9,2.9 DA15.3 ; v1@39.35,2.95 39.65,2.65 41.15,2.65 41.45,2.95 DA17.3@43.2,2.95
+5V: C3.1 C6.1 C8.1 C29.1 C31.1 DA1.1 DA12.1 DA13.1 R4.2 VT1.1 VT2.3 VT4.3 VT5.3 | length 114
  Top Layer w0.3: C3.1@91.45,11.6 91.45,11.15 91.7,10.9 DA1.1 ; 95.9,12.8 96.52,12.18 VT2.3@96.52,11.5
  Top Layer w0.5: VT5.3 v1(69.751,2.13) ; VT4.3@67.1,8.875 68.825,8.875 v1(69,8.7) ; v1@89.3,6.4 97.5,6.4 98.7,7.6 v1(98.7,8.8) 98.7,11.8 97.7,12.8 ; C3.1@91.45,11.6 91.45,12.35 91.9,12.8 95.9,12.8 97.7,12.8 ; R4.2@104.9,2.35 104.9,3.185 100.16,7.925 VT1.1 100.16,12.34 99.7,12.8 97.7,12.8
  Bottom Layer w0.5: C31.1@62.1,2.25 DA13.1 63.7,1.3 64.4,0.6 71.281,0.6 ; C29.1@62.1,8.65 C29.1 62.1,7.9 62.6,7.4 64.2,7.4 ; DA12.1 63.7,7.9 64.2,7.4 ; v1(69,8.7) 70.3,7.4 ; C8.1@72.4,4.25 72.1,3.95 72.1,2.8 74.3,0.6 ; v1@89.35,6.45 89.35,6.15 89.85,5.65 89.85,3.85 87.6,1.6 85.85,1.6 84.85,0.6 74.3,0.6 ; v1(98.7,8.8) 106.9,8.8 107.75,7.95 C6.1 ; 64.2,7.4 70.3,7.4 ; 70.3,7.4 70.3,2.679 v1(69.751,2.13) 71.281,0.6 ; 71.281,0.6 74.3,0.6
  other v1: 89.1,6.4
Cabel_Divider: C9.1 DA3.23 DA3.59 R2.1 R6.2 | length 60.4
  Top Layer w0.3: v1(77.75,3.85) 77.75,4.35 78.75,5.35 DA3.59 78.75,13.275 78.75,13.32 78.955,13.525 102.475,13.525 105.8,10.2 R2.1 117.5,11.25 117.75,11.5 118.4,11.5 118.65,11.75 R6.2@118.65,12.4 ; DA3.23 79.25,3.15 v1@79.913,3.812
  Bottom Layer w0.3: v1(77.75,3.85) 78.95,3.85 79,3.8 v1(79.925,3.8) 80.699,3.8 81.25,4.351 C9.1@81.25,5.1
GND: C1.2 C2.2 C3.2 C5.2 C6.2 C7.2 C8.2 C9.2 C10.2 C11.2 C12.2 C13.2 C14.2 C15.2 C17.2 C19.2 C20.2 C21.2 C23.2 C25.2 C26.2 C27.2 C28.2 C29.2 C30.2 C31.2 C32.2 C33.2 C34.2 C35.2 C38.2 DA1.2 DA1.3 DA2.5 DA3.10 DA3.11 DA3.53 DA3.62 DA3.63 DA4.5 DA5.2 DA6.2 DA7.5 DA8.2 DA9.2 DA10.5 DA11.5 DA12.2 DA12.3 DA13.2 DA13.3 DA14.2 DA15.2 DA16.2 DA17.2 E2.1 E6.1 E7.1 E20.1 R6.1 R7.1 R8.1 R10.1 R17.1 R22.1 R26.1 R28.1 R32.1 R41.1 R47.1 VD4.1 VD4.2 VD6.1 VD6.2 VD9.1 VD9.2 VD10.1 VD11.1 VD11.2 VD14.2 VT3.2 | length 265.5
  Top Layer w0.3: DA3.11 76.1,5.75 ; DA3.10 75.6,6.25 76.1,5.75 ; v1(75.825,5.175) 75.825,5.475 76.1,5.75 ; DA3.63 76.75,11.8 v1@77.25,11.3 ; v1(77.2,11.25) v1@77.25,11.3 ; DA3.62 v1@77.25,11.3 ; DA3.53 81.75,11.85 81.875,11.725 84.45,11.725 84.75,12.025 v1(85.375,12.025) ; v1@85.25,12.375 85.375,12.25 v1(85.375,12.025) ; v1@87.213,4.913 87.238,4.888 87.25,4.875 88.125,4 90.675,4 90.7,3.975 ; R8.1@87.25,7.7 87.9,8.35 87.9,10.625 86.5,12.025 v1(85.375,12.025) ; VD14.2 90.4,2.725 90.7,3.025 90.7,3.975 ; C3.2 89.9,12.375 89.45,12.825 86.175,12.825 v1(85.375,12.025) ; C3.2@89.95,11.6 90,11.55 90,11.1 89.8,10.9 DA1.3 DA1.2 ; 90.8,4.025 90.75,4.025 90.7,3.975
  Top Layer w0.5: C33.2@17.15,5.4 15.65,5.4 15.65,2.6 19.1,2.6 v1(20,1.7) ; C14.2@17.15,12.3 C14.2 15.65,12.3 15.65,9.5 R17.1 19.1,9.5 v1(20,8.6) ; DA10.5 29.275,1.225 29.175,1.125 v1(31.825,1.125) ; DA4.5 v1(31.8,8) ; C25.2@29.65,5.4 C25.2 v1(31.1,5.4) ; C7.2@29.65,12.3 C7.2 v1(31.1,12.3) ; C34.2@43.55,5.4 42.05,5.4 42.05,2.6 45.8,2.6 v1(46.4,2) ; C21.2@43.55,12.3 42.05,12.3 42.05,9.5 R32.1 45.5,9.5 v1(46.4,8.6) ; DA11.5 58.478,1.4 v1(58.503,1.425) ; DA7.5 58.1,8 v1(58.725,8.625) ; C26.2@56.05,5.3 C26.2 v1(58.9,5.3) ; C19.2@56.05,12.3 C19.2 56.176,12.376 v1(58.25,12.376) ; v1(61.8,5.9) C32.2@65.05,5.9 ; v1(61.8,13) C30.2 C30.2@65.05,13 ; v1@87.1,4.75 87.1,4.8 v1@87.213,4.913 ; v1(87.25,4.825) 87.25,4.875 R8.1@87.25,7.7 ; DA1.2 90.75,9.25 91.1,8.9 v1@93.2,8.9 ; 90.8,4.025 v1(98.125,4.025) 99.775,4.025 102.24,1.56 E20.1 ; C1.2@107.725,12.425 107.9,12.25 107.8,12.25 108,12.05 108.45,12.5 v1(110.3,12.5) v1(115.7,12.5) 117.05,12.5 R6.1@117.15,12.4 ; DA2.5 114.75,3.75 114.95,3.55 115.5,3.55 R7.1 v1(115.5,5.8) ; v1@121.3,8 v1@121.5,8.2 ; v1(121.4,8.3) 121.4,10.5 123.4,12.5 123.4,9.45 VD10.1@123.5,9.35
  Bottom Layer w0.3: VD11.2 57.2,4.6 ; VD11.1 57.2,5.6 ; C10.2 75.8,5.45 75.8,5.2 v1(75.825,5.175) ; v1@77.25,11.65 C15.2@77.25,12.4 ; 79.15,5.175 79.75,5.175 80.575,6 82,6 83.15,4.85 87.15,4.85 87.25,4.75 v1@87.375,4.75
  Bottom Layer w0.4: v1(75.825,5.175) 79.15,5.175
  Bottom Layer w0.5: E6.1@4,2.5 5,1.5 6.5,1.5 ; E7.1 4,10 5,9 6.5,9 ; C31.2@62.1,3.75 62.75,3.75 63.15,4.15 DA13.3 ; C29.2@62.1,10.15 62.65,10.15 63.05,10.55 DA12.3 ; 63.5,13.4 71.2,13.4 72.1,12.5 C8.2 ; R28.1@63.55,5.6 63.55,4.95 63.7,4.8 DA13.3 ; R26.1@63.55,12 63.55,11.35 63.8,11.1 63.8,10.65 DA12.3 ; DA13.2 DA13.3 ; DA12.2 DA12.3 ; C8.2@72.4,10.35 74.7,10.35 ; v1@76,5.45 75.8,5.45 75.35,5.45 74.95,5.85 74.95,7.525 74.7,7.775 74.7,10.35 ; C13.2 79.125,5.2 79.15,5.175 ; v1(85.375,12.025) 85.375,12.15 85.125,12.4 81.175,12.4 80.025,11.25 v1(77.2,11.25) 75.346,11.25 74.7,10.604 74.7,10.35 ; 95.988,11.713 v1(93.2,8.925) 98.1,4.025 v1(98.125,4.025) ; 96.4,5.75 C5.2@99.7,5.75 ; C5.2 101.475,5.95 103.275,4.15 ; E20.1 102.24,3.54 102.85,4.15 103.275,4.15 ; R10.1@106,3.15 106.65,3.15 VT3.2 107.75,4.15 ; v1(110.3,12.5) 110.3,6.1 ; v1@115.5,5.5 v1(115.5,5.8) 115.5,6.8 ; R22.1@118.5,4.1 120.1,4.1 121.3,5.3 ; v1(121.4,8.3) 121.4,5.4 121.3,5.3 ; 103.275,4.15 107.75,4.15 ; 107.75,4.15 109.25,4.15 110.3,5.2 110.3,6.1 ; 110.3,6.1 111,6.8 115.5,6.8 ; 115.5,6.8 116.5,6.8 118,5.3 121.3,5.3
  Bottom Layer w1: 60,6.1 60,7.4
JK: E1.1 VD1.1 VD10.2 | length 11.3
  Top Layer w0.8: VD1.1 117.7,2.8 118.2,3.3 121.6,3.3 123.4,1.5 VD10.2@123.4,4.85
JK_IN: R2.2 VD1.2 VD2.1 VD3.2 | length 12.2
  Top Layer w0.5: R2.2 VD2.1 118.7,8.3 117.7,7.3 VD1.2 118.95,6.05 119.5,6.6 v1(119.75,6.6)
  Bottom Layer w0.5: VD3.2 118.75,8.75 119.75,7.75 v1(119.75,6.6) v1@119.7,6.6
MSP: DA3.22 DA3.40 | length 10.8
  Top Layer w0.3: DA3.22 78.75,4.25 80.275,5.775 82.656,5.775 83.631,6.75 84.419,6.75 DA3.40
MSP_EN: DA3.39 R9.1 | length 24.4
  Top Layer w0.3: v1@84.125,5.7 84.675,6.25 DA3.39 ; v1(88.8,5) 88.9,5.1 101.5,5.1 v1(103.5,3.1)
  Bottom Layer w0.3: v1@84.275,5.55 v1(84.025,5.8) 88,5.8 v1(88.8,5) v1@89,5 ; v1(103.5,3.1) R9.1@104.9,3.1
MSP_TCK: DA3.57 E23.1 VD14.1 | length 27.2
  Top Layer w0.3: DA3.57 79.75,9.325 80.925,8.15 83.25,8.15 v1@83.3,8.1 ; E23.1@89.54,0.46 89.08,0.46 89.4,0.78 89.4,1.15 88.7,1.85 88.7,2.975 89.1,3.375 VD14.1
  Bottom Layer w0.3: v1(83.6,8.15) 89.45,8.15 91.1,6.5 91.1,3.125 89.54,1.565 E23.1
MSP_TDI: DA3.55 E19.1 VD14.4 | length 27.5
  Top Layer w0.3: DA3.55 80.75,10.65 80.9,10.5 v1@81.4,10.5 ; VD14.4 93.725,2.075 94.62,1.18 E19.1@94.62,0.46
  Bottom Layer w0.3: v1(81.2,10.2) 82.8,10.2 83.4,9.6 89.484,9.6 92.2,6.884 92.2,3.7 94.48,1.42 E19.1@94.48,0.14 ; E19.1 E19.1@94.48,0.14 ; E19.1@94.62,0.46 E19.1@94.62,0.68 ; E19.1@94.76,0.14 E19.1@94.48,0.14
MSP_TDO: DA3.54 E18.1 VD14.5 | length 30
  Top Layer w0.3: DA3.54 81.25,11.55 82.1,10.7 v1(84,10.7) ; VD14.5 93.607,3.375 96.522,0.46 E18.1@97.16,0.46
  Bottom Layer w0.3: v1(84,10.7) 84.6,10.1 89.692,10.1 92.9,6.892 92.9,4.26 E18.1
MSP_TMS: DA3.56 E21.1 VD14.3 | length 25.8
  Top Layer w0.3: DA3.56 80.25,9.75 80.9,9.1 v1(82.2,9.1) ; VD14.3 89.6,1.657 89.832,1.425 90.655,1.425 91.62,0.46 E21.1@92.08,0.46
  Bottom Layer w0.3: v1(82.2,9.1) 89.277,9.1 91.7,6.677 91.7,3.1 92.08,2.72 E21.1
NetC4_1: C4.1 DA2.3 R1.1 VT1.2 | length 16.3
  Top Layer w0.5: VT1.2@101.43,11.5 VT1.2 101.43,8.42 105.575,4.275 106.525,4.275 107.6,3.2 C4.1 107.6,2.35 108.15,2.35 108.7,1.8 R1.1 ; R1.1@109.6,1.9 109.65,1.85 DA2.3
NetC4_2: C4.2 DA2.4 R4.1 R7.2 | length 11.3
  Top Layer w0.5: R4.1@106.4,2.35 106.4,1.4 107.15,0.65 113.35,0.65 114,1.3 DA2.4 114.65,1.85 114.85,2.05 R7.2@115.5,2.05
NetC16_1: C16.1 R16.2 | length 1.2
  Bottom Layer w0.5: R16.2@25.9,10.45 C16.1@27.1,10.45
NetC16_2: C16.2 E8.1 VD4.3 | length 3.1
  Bottom Layer w0.3: E8.1 C16.2 ; C16.2@27.2,11.95 27.25,12 VD4.3@28.4,12
NetC18_1: C18.1 DA5.4 E11.1 R19.2 | length 18.1
  Bottom Layer w0.3: C18.1@6,12.396 6.004,12.4 DA5.4 9,13.1 9.4,13.5 21.5,13.5 22,13 E11.1
NetC18_2: C18.2 DA5.1 R19.1 R20.2 | length 9.1
  Bottom Layer w0.3: C18.2@6,10.896 10.504,10.896 10.9,10.5 DA5.1 11.4,9.8 12.55,10.95 R20.2@13.8,10.95
NetC22_1: C22.1 R31.2 | length 1.3
  Bottom Layer w0.5: R31.2@52.35,10.4 52.4,10.45 C22.1@53.6,10.45
NetC22_2: C22.2 E10.1 VD6.3 | length 6.7
  Bottom Layer w0.3: E10.1 51.6,13 52,13.4 54.3,13.4 54.8,12.9 VD6.3 53.65,12 C22.2@53.6,11.95
NetC24_1: C24.1 DA8.4 E12.1 R36.2 | length 18.1
  Bottom Layer w0.3: C24.1@32.404,12.4 DA8.4 35.4,13.1 35.8,13.5 47.9,13.5 48.4,13 E12.1
NetC24_2: C24.2 DA8.1 R36.1 R37.2 | length 9.1
  Bottom Layer w0.3: C24.2@32.4,10.896 36.904,10.896 37.3,10.5 DA8.1 37.8,9.8 38.95,10.95 R37.2@40.2,10.95
NetC36_1: C36.1 R45.2 | length 1.2
  Bottom Layer w0.5: R45.2@25.85,3.5 R45.2 C36.1@27.05,3.5
NetC36_2: C36.2 E9.1 VD9.3 | length 3.1
  Bottom Layer w0.3: E9.1 C36.2 ; C36.2@27.2,5.05 27.25,5.1 VD9.3@28.4,5.1
NetC37_1: C37.1 R46.2 | length 1.2
  Bottom Layer w0.5: R46.2@52.4,3.55 C37.1@53.6,3.55
NetC37_2: C37.2 E15.1 VD11.3 | length 6.7
  Bottom Layer w0.3: E15.1 51.6,6.1 52,6.5 54.3,6.5 54.8,6 VD11.3 53.65,5.1 C37.2@53.6,5.05
NetC39_1: C39.1 DA14.4 E13.1 R50.2 | length 18.1
  Bottom Layer w0.3: C39.1@6,5.496 6.004,5.5 DA14.4 9,6.2 9.4,6.6 21.5,6.6 22,6.1 E13.1
NetC39_2: C39.2 DA14.1 R50.1 R52.2 | length 9.1
  Bottom Layer w0.3: C39.2@6,3.946 10.504,3.946 10.9,3.55 10.9,2.85 11.4,2.85 12.55,4 R52.2@13.8,4
NetC40_1: C40.1 DA15.4 E16.1 R51.2 | length 18.1
  Bottom Layer w0.3: C40.1@32.404,5.5 DA15.4 35.4,6.2 35.796,6.596 47.904,6.596 48.4,6.1 E16.1
NetC40_2: C40.2 DA15.1 R51.1 R53.2 | length 9.1
  Bottom Layer w0.3: C40.2@32.4,3.996 36.904,3.996 37.3,3.6 DA15.1 37.8,2.9 38.95,4.05 R53.2@40.2,4.05
NetDA1_4: DA1.4 R5.1 R8.2 | length 6.6
  Top Layer w0.3: v1(88.4,11.825) 88.8,11.425 R8.2 ; R8.2@88.75,7.7 R8.2 ; DA1.4 R8.2
  Bottom Layer w0.3: v1(88.4,11.825) 88.775,11.45 R5.1
NetDA1_5: DA1.5 VT2.2 | length 6.8
  Top Layer w0.3: DA1.5 94.275,7.7 95.25,8.675 VT2.2 VT2.2@95.25,11.5
NetDA3_8: DA3.8 R11.2 | length 5.1
  Top Layer w0.3: DA3.8 75.75,7.25 76.825,6.175 v1(77.575,6.175)
  Bottom Layer w0.3: R11.2 77.375,6.375 v1(77.575,6.175) 77.575,6.55 v1@77.55,6.575
NetDA3_34: DA3.34 E27.1 | length 1.4
  Top Layer w0.3: DA3.34 E27.1
NetDA3_44: DA3.44 E26.1 | length 1.4
  Top Layer w0.3: DA3.44 E26.1
NetDA3_45: DA3.45 E25.1 | length 1.5
  Top Layer w0.3: DA3.45 86.325,9.25 86.575,9.5 E25.1
NetDA3_47: DA3.47 E24.1 | length 1.4
  Top Layer w0.3: DA3.47 E24.1
NetDA4_1: DA4.1 E3.1 R13.2 R33.1 | length 49.3
  Top Layer w0.3: R13.2 29.3,9.2 29.5,9.4 30.275,9.4 30.475,9.6 30.95,9.6 29.95,10.6 DA4.1 ; E3.1@30.1,9.213 32.788,9.213 34.9,7.1 R33.1 R33.1@70.25,7.1
NetDA4_3: DA4.3 R13.1 R15.2 | length 9.4
  Top Layer w0.3: v1@20.4,10.4 23.325,10.4 ; R13.1 23.325,9.375 23.325,10.4 ; DA4.3 25.5,10.6 25.3,10.4 23.325,10.4
  Bottom Layer w0.3: v1@20.4,10.4 R15.2 R15.2@21.65,10.4
  other v1: 20.4,10.5
NetDA6_1: DA6.1 R15.1 R16.1 R18.1 | length 10.9
  Bottom Layer w0.3: R18.1@15.2,10.95 18.25,10.95 18.65,10.55 DA6.1 19.756,9.8 20.007,9.55 22.85,9.55 23.15,9.85 R15.1@23.15,10.4
  Bottom Layer w0.5: R15.1@23.15,10.4 R15.1 R16.1 R16.1@24.45,10.4
NetDA6_4: DA6.4 R18.2 R20.1 | length 3
  Bottom Layer w0.3: R20.1@13.9,12.45 15.3,12.45 15.35,12.4 DA6.4 DA6.4@16.85,12.4
NetDA7_1: DA7.1 E4.1 R21.2 R23.1 | length 16.4
  Top Layer w0.3: DA7.1 57.05,10.6 57.1,10.55 62.05,10.55 65,7.6 69.35,7.6 R23.1@70.25,8.5
NetDA7_3: DA7.3 R21.1 R30.2 | length 14.2
  Top Layer w0.3: v1@46.8,10.4 51.7,10.4 ; DA7.3 51.9,10.6 51.7,10.4 ; R21.1@57.2,9.05 53.05,9.05 51.7,10.4
  Bottom Layer w0.3: v1@46.8,10.4 R30.2 R30.2@48.05,10.4
  other v1: 46.8,10.5
NetDA9_1: DA9.1 R30.1 R31.1 R35.1 | length 10.9
  Bottom Layer w0.3: R35.1@41.6,10.95 44.65,10.95 45.05,10.55 DA9.1 46.157,9.8 46.407,9.55 49.25,9.55 49.55,9.85 R30.1@49.55,10.4
  Bottom Layer w0.5: R30.1@49.55,10.4 R30.1 R31.1 R31.1@50.85,10.4
NetDA9_4: DA9.4 R35.2 R37.1 | length 3
  Bottom Layer w0.3: R37.1@40.2,12.45 41.6,12.45 41.65,12.4 DA9.4
NetDA10_1: DA10.1 E5.1 R34.1 R38.2 | length 50.5
  Top Layer w0.3: R38.2 25.35,2.025 26.025,2.7 30.425,2.7 E5.1 ; DA10.1 30.1,4 30.65,3.45 E5.1 ; R34.1@71.45,1 R34.1 70.757,1 70.217,0.46 34.315,0.46 32.3,2.475 E5.1
NetDA10_3: DA10.3 R38.1 R42.2 | length 10.9
  Top Layer w0.3: v1(20.1,4) 20.6,3.5 23.35,3.5 ; R38.1 23.5,3.35 23.35,3.5 ; DA10.3@27.2,3.7 26.9,4 25.868,4 25.368,3.5 23.35,3.5
  Bottom Layer w0.3: v1(20.1,4) 20.6,3.5 R42.2@21.65,3.5
NetDA11_1: DA11.1 E14.1 R24.1 R39.2 | length 17.8
  Top Layer w0.3: DA11.1 R39.2 57.25,3.95 59.25,3.95 62.2,1 70.05,1 R24.1@71.45,2.4
NetDA11_3: DA11.3 R39.1 R43.2 | length 15.3
  Top Layer w0.3: v1(46.5,4) 47,3.5 51.7,3.5 ; DA11.3@53.6,3.7 53.3,4 52.268,4 51.768,3.5 51.7,3.5 ; R39.1@57.2,2.45 52.75,2.45 51.7,3.5
  Bottom Layer w0.3: v1(46.5,4) 47,3.5 R43.2 R43.2@48.05,3.5
NetDA12_4: DA12.4 R25.1 R26.2 | length 2.7
  Bottom Layer w0.5: R26.2@65.05,12 R26.2 R25.1 DA12.4
NetDA12_5: DA12.5 VT4.2 | length 5.1
  Top Layer w0.5: VT4.2@67.1,10.175 v1(69,10.175)
  Bottom Layer w0.5: DA12.5 67.05,8.65 v1(69,10.175)
NetDA13_4: DA13.4 R27.1 R28.2 | length 3.1
  Bottom Layer w0.5: R28.2@65.05,5.9 R28.2 R27.1 66.35,5.9 66.35,4.2 DA13.4
NetDA13_5: DA13.5 VT5.2 | length 5.1
  Top Layer w0.5: VT5.2 v1(69,3.4)
  Bottom Layer w0.5: DA13.5 67.85,2.25 v1(69,3.4)
NetDA16_1: DA16.1 R42.1 R45.1 R48.1 | length 10.9
  Bottom Layer w0.3: R48.1@15.2,4.05 18.25,4.05 18.65,3.65 DA16.1 19.757,2.9 20.007,2.65 22.85,2.65 23.15,2.95 R42.1@23.15,3.5
  Bottom Layer w0.5: R42.1@23.15,3.5 R45.1@24.45,3.5
NetDA16_4: DA16.4 R48.2 R52.1 | length 2.6
  Bottom Layer w0.3: R52.1@13.95,5.55 14,5.5 DA16.4@16.55,5.5
NetDA17_1: DA17.1 R43.1 R46.1 R49.1 | length 11.2
  Bottom Layer w0.3: R49.1@41.6,4.05 44.65,4.05 45.05,3.65 45.05,2.95 46.95,2.95 47.5,2.4 49.1,2.4 49.55,2.85 R43.1@49.55,3.5
  Bottom Layer w0.5: R43.1@49.55,3.5 R43.1 R46.1 R46.1@50.85,3.5
NetDA17_4: DA17.4 R49.2 R53.1 | length 3
  Bottom Layer w0.3: R53.1@40.2,5.55 41.6,5.55 41.65,5.5 DA17.4
NetR9_2: R9.2 R10.2 VT3.1 | length 3.1
  Bottom Layer w0.3: R9.2@104.9,1.65 106.575,1.65 106.975,1.25 107.55,1.25 VT3.1@107.75,1.05
NetR22_2: R22.2 VD12.1 | length 2
  Bottom Layer w0.5: VD12.1 116.55,0.95 R22.2@118.5,0.95
NetVD3_1: VD3.1 VD5.2 | length 1.9
  Bottom Layer w0.5: VD5.2 113.55,8.6 VD3.1@113.65,8.5
NetVD5_1: VD5.1 VD7.2 VT3.3 | length 4.5
  Bottom Layer w0.5: VT3.3 109.85,3.25 110.7,4.1 VD7.2 VD5.1@111.75,5.25
NetVD7_1: VD7.1 VD8.2 | length 2.4
  Bottom Layer w0.8: VD7.1@112.1,0.9 VD8.2@114.5,0.9
NetVD8_1: VD8.1 VD12.2 | length 2
  Bottom Layer w0.5: VD8.1@114.5,4.1 VD12.2
Press: DA3.13 DA3.14 E32.1 | length 3.7
  Top Layer w0.3: E32.1 72.425,4.75 73.125,4.75 ; DA3.14 73.425,4.25 73.125,4.55 73.125,4.75 ; DA3.13 73.125,4.75
PRESS_REF_SCK_MCU: DA3.28 R23.2 | length 16.6
  Top Layer w0.3: R23.2@71.75,8.5 R23.2 v1(72.9,8.5) ; DA3.28 v1(81.75,2.8) v1@81.75,2.9
  Bottom Layer w0.3: v1(72.9,8.5) 74.3,7.1 74.3,3.225 75.225,2.3 81.15,2.3 v1@81.75,2.9
PRESS_SIMO_MCU: DA3.32 R33.2 | length 18.6
  Top Layer w0.3: R33.2@71.75,7.1 R33.2 v1(72.9,7.1) ; DA3.32 83.75,2.05 84.15,2.45 v1(84.15,3.05)
  Bottom Layer w0.3: v1(72.9,7.1) 73.8,6.2 73.8,2.9 75.1,1.6 82.4,1.6 v1@83.75,2.95
R\S\T\: C13.1 DA3.58 E22.1 R12.1 | length 27.8
  Top Layer w0.3: DA3.58 79.25,8.85 81.2,6.9 82.35,6.9 v1@82.55,7.1
  Bottom Layer w0.3: R12.1 80.725,8.275 C13.1 80.75,6.925 v1(82.454,6.925) 87.9,6.925 88.35,7.375 89.469,7.375 90.6,6.244 90.6,3.6 E22.1 E22.1@86.87,0.13
Ref: DA3.12 E31.1 | length 2.1
  Top Layer w0.3: E31.1 73.25,5.4 73.4,5.25 DA3.12
Temp: DA3.15 E33.1 | length 2.1
  Top Layer w0.3: E33.1 DA3.15
TEMP_REF_SCK_MCU: DA3.31 R24.2 | length 13.6
  Top Layer w0.3: R24.2@72.95,2.4 R24.2 75.5,2.4 76.225,3.125 v1(76.225,3.375) ; v1(82.8,3.8) 82.8,2.9 83.25,2.45 DA3.31
  Bottom Layer w0.3: v1(76.225,3.375) 76.8,2.8 80.407,2.8 81.357,3.75 82.45,3.75 v1@82.7,4
TEMP_SIMO_MCU: DA3.29 R34.2 | length 10.3
  Top Layer w0.3: R34.2@72.95,1 R34.2 73.6,1 74.125,0.475 82.045,0.475 82.25,0.68 DA3.29
pads on no net: DA2.1 DA2.2 DA3.2 DA3.3 DA3.4 DA3.5 DA3.6 DA3.7 DA3.9 DA3.16 DA3.17 DA3.18 DA3.19 DA3.20 DA3.21 DA3.24 DA3.25 DA3.26 DA3.27 DA3.30 DA3.33 DA3.35 DA3.36 DA3.37 DA3.38 DA3.41 DA3.42 DA3.43 DA3.46 DA3.48 DA3.49 DA3.50 DA3.51 DA3.52 DA3.60 DA3.61 E1.2 E2.2

## Polygon pours and split planes (outlines as drawn)
GND on Bottom Layer "BOTTOM_GND" (solid, remove dead copper, pour order 6): 93.8,13.7 118.17,13.7 119.4,13.7 122,10.6 124.3,10.6 124.3,7.5 120.8,7.5 120.8,10 113.3,10 113.3,7.1 113.3,10 94.2,10 93.8,10
GND on Bottom Layer "GND" (solid, pour order 10): 5.5,0.4 64.4,0.4 64.4,3.3 64.4,6.7 56.9,6.7 56.9,4.1 31.8,4.1 31.8,6.6 29.4,6.6 29.4,3.999 5.5,4.098
GND on Bottom Layer "GND" (solid, pour order 8): 5.5,7.3 64.4,7.3 64.4,10.2 64.4,13.7 55.8,13.7 55.8,11.1 31.8,11.1 31.8,13.6 29.4,13.6 29.4,11.1 5.5,11.1

## Keep-outs
Keep-Out Layer:
  lines w0.1: 85.875,0.25 0.25,0.25 0.25,3.75 1.5,3.75 ccw(c1.5,7) 1.5,10.25 0.25,10.25 0.25,13.75 129.75,13.75 129.75,0.25 106.225,0.25 ; 103.375,0.25 104.275,0.25 ; 104.281,0.248 cw(c105.25,0) 106.219,0.248

## Other copper
Top Layer:
  text "A" at 1,12.5 h1.2
  text "D650" at 0.5,1.4 h1.2
  text "2106" at 0.5,0.5 h1.2
Bottom Layer:
  pour cut-out: 113.75,9.75 113.75,7.75 116.75,7.75 116.75,9.75
  text "B" at 1,12.5 h1.2